# EAGLE board ESP32 Display 4.3 inch V1.2(1) (EAGLE 9.6.2), part 1 of 2
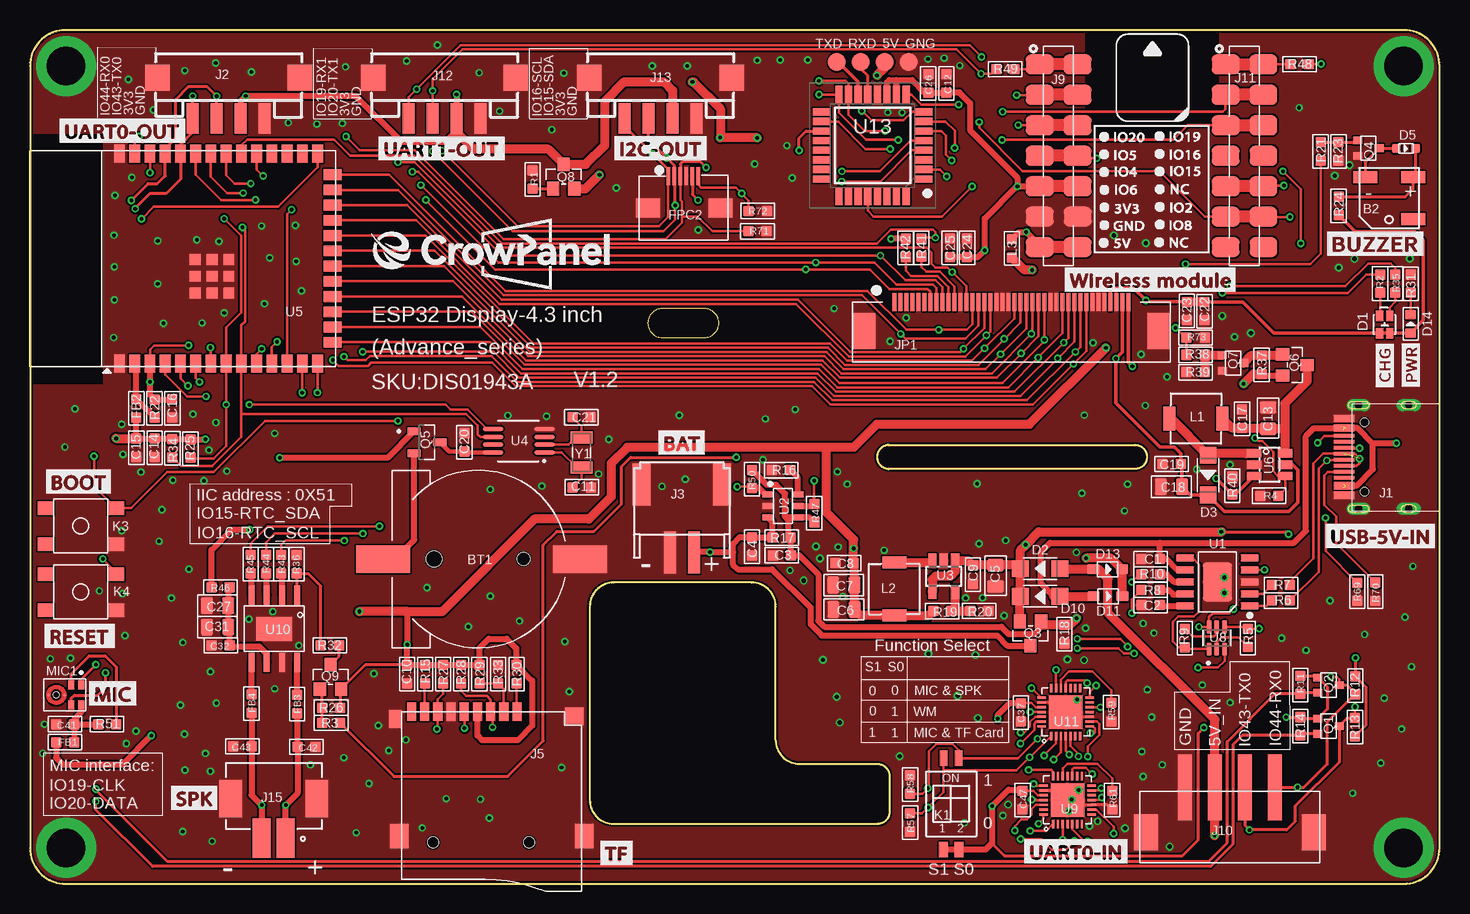
[diagram p0: board, top side]
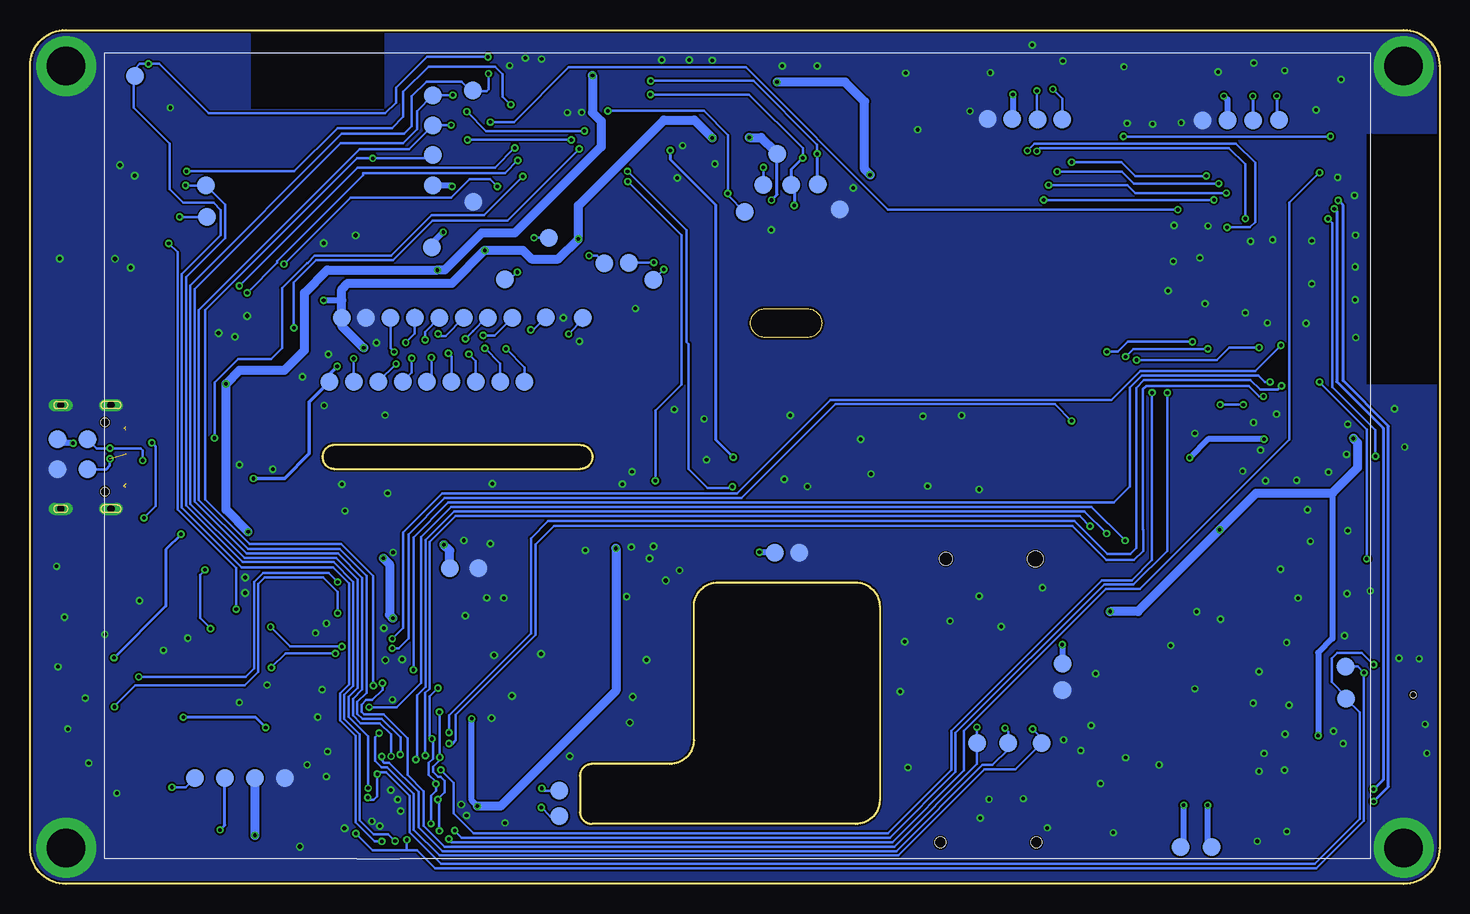
[diagram p1: board, bottom side, seen from below]

Size 117.5 x 71.2 mm. Coordinates in mm from the lower left corner, seen from the top.
Outline: 114.5,71.2 3,71.2 arc90 0,68.2 0,3 arc90 3,0 114.5,0 arc90 117.5,3 117.5,68.2 arc90 114.5,71.2
Outline: 70.62,35.6 arc90 71.62,34.6 92.12,34.6 arc90 93.12,35.6 arc90 92.12,36.6 71.62,36.6 arc90 70.62,35.6
Outline: 70.65,10 arc-90 71.65,9 71.65,6 arc-90 70.65,5 48.67,5 arc-90 46.67,7 46.67,23.13 arc-90 48.67,25.13 60.17,25.13 arc-90 62.17,23.13 62.17,12 arc90 64.17,10 70.65,10
Outline: 52.7,45.56 56.22,45.56 arc180 56.22,47.96 52.7,47.96 arc180 52.7,45.56
Copper layers (1*16): Top 0.035mm / dielectric 1.5mm / Bottom 0.035mm
Design rules "default *": minimum track width 8mil, minimum drill 0.3mm, track to track 6mil, track to pad 6mil, pad to pad 4mil, via to via 6mil, smd to smd 6mil, copper to edge 6mil, drill to drill 4mil, minimum pad ring 6mil, minimum via ring 6mil, stop-mask expansion 4mil, vias tented up to drill 100mil, thermal gap 0mil
tKeepout: area 54.3,22.9 to 63.2,29.9; area 0,41.7 to 6,62.4
tRestrict: area 88,64.6 to 99.1,71.2; area 0.1,41.7 to 6.1,62.5
bRestrict: area 88,64.6 to 99.1,71.2; area -0.1,41.7 to 6.1,62.5

## Footprints (pad centres in the part's own frame; a part is rotated, then mirrored left to right if it is on the bottom)
BEEP_5025 = smd 2 x 1: 1 -2,-1.75; 2 2,-1.75; 3 -2,1.75
CR1220 = smd 2.3 x 4.5: N 0,8.425; P 0,-7.975 | hole 1.3: 0,-3.725 | hole 1.05: 0,3.725
C0603 = smd 0.889 x 0.889: 1 -0.762,0; 2 0.762,0
C0805 = smd 1.016 x 1.397: 1 -0.889,0; 2 0.889,0
LED_KT-0603RYG = smd 0.85 x 0.6: 1 0.725,-0.425; 2 0.725,0.425; 3 -0.725,-0.425; 4 -0.725,0.425
D_SOD123FL = smd 1.397 x 1.397: + -1.651,0; - 1.651,0
D_SOD523 = smd 0.762 x 0.7: + -0.8,0; - 0.8,0
D_SOD323 = smd 1 x 0.8: + -1.2,0; - 1.2,0
LED0603 = smd 0.762 x 0.889: + -0.762,0; - 0.762,0
L0603 = smd 0.889 x 0.889: 1 -0.762,0; 2 0.762,0
FPC-6PIN-0.5MM = smd 0.3 x 1.5: 1 -1.31,2.184; 2 -0.81,2.184; 3 -0.31,2.184; 4 0.19,2.184; 5 0.69,2.184; 6 1.19,2.184 | smd 2 x 1.6: 7 -3.01,-0.496; 8 3.036,-0.496
USB-3.0TYPEC-SMD = smd 0.3 x 1.7: A1 -3.35,0.5; A4 -2.55,0.5; A5 -1.25,0.5; A6 -0.25,0.5; A7 0.25,0.5; A8 1.25,0.5; A9 2.55,0.5; A12 3.35,0.5; B1 3.05,0.5; B4 2.25,0.5; B5 1.75,0.5; B6 0.75,0.5; B7 -0.75,0.5; B8 -1.75,0.5; B9 -2.25,0.5; B12 -3.05,0.5 | drill 0.6 pad 1.016 long: P$1 -4.325,-0.72; P$2 4.325,-0.72; P$3 -4.325,-4.9; P$4 4.325,-4.9 | hole 0.68: -2.89,-1.22; 2.89,-1.22
CONNECTOR_4P-SMD-2.0 = smd 0.965 x 2.54: 1 -3,0; 2 -1,0; 3 1,0; 4 3,0 | smd 2.032 x 2.184: SS1 -5.946,3.4; SS2 5.946,3.4
PH2.0WT-2PIN = smd 1 x 3.5: P$1 -1,0; P$2 1,0 | smd 1.5 x 3.5: P$3 -3.35,-5.7; P$4 3.35,-5.7
THO-M3.2*5MM-HOLE = drill 3.2 pad 5: P$1 0,0
9P-SMD-W/-RING = smd 1.524 x 0.762: 1 0,4.4; 2 0,3.3; 3 0,2.2; 4 0,1.1; 5 0,0; 6 0,-1.1; 7 0,-2.2; 8 0,-3.3; 9 0,-4.4 | smd 1.524 x 1.016: G1 0.6,-5.746 | smd 2.032 x 1.524: G2 10.373,-5.4; G3 10.373,10 | smd 1.524 x 1.524: G4 0.392,9.181 | hole 0.889: 10.9,-2.6; 10.9,5.4
H7-2.54-18.28X2.5X5MM = smd 1.65 x 2.3: 1 -7.62,-1.58; 1-1 -7.62,1.58; 2 -5.08,-1.58; 2-2 -5.08,1.58; 3 -2.54,-1.58; 3-3 -2.54,1.58; 4 0,-1.58; 4-4 0,1.58; 5 2.54,-1.58; 5-5 2.54,1.58; 6 5.08,-1.58; 6-6 5.08,1.58; 7 7.62,-1.58; 7-7 7.62,1.58
XH2.54-4P-SMD = smd 1.2 x 5.5: 1 -3.75,-1.875; 2 -1.25,-1.875; 3 1.25,-1.875; 4 3.75,-1.875 | smd 2 x 3: 5 -7,1.875; 6 7,1.875
TEST-PIN-4-2.0MM = smd 1.5 x 1.5: 1 -3,0; 2 -1,0; 3 1,0; 4 3,0
CONN-TH_2P-P2.00_XUNPU_WAFER-PH2.0-2PLB = smd 1.5 x 3.3: 1 -1,1.65; 2 1,1.65 | smd 1.9 x 3.1: 3 3.6,-1.65; 4 -3.6,-1.65
COOPER_0.5MM*40P = smd 0.3 x 1.5: P$1 -8.81,1.73; P$2 -8.31,1.73; P$3 -7.81,1.73; P$4 -7.31,1.73; P$5 -6.81,1.73; P$6 -6.31,1.73; P$7 -5.81,1.73; P$8 -5.31,1.73; P$9 -4.81,1.73; P$10 -4.31,1.73; P$11 -3.81,1.73; P$12 -3.31,1.73; P$13 -2.81,1.73; P$14 -2.31,1.73; P$15 -1.81,1.73; P$16 -1.31,1.73; P$17 -0.81,1.73; P$18 -0.31,1.73; P$19 0.19,1.73; P$20 0.69,1.73; P$21 1.19,1.73; P$22 1.69,1.73; P$23 2.19,1.73; P$24 2.69,1.73; P$25 3.19,1.73; P$26 3.69,1.73; P$27 4.19,1.73; P$28 4.69,1.73; P$29 5.19,1.73; P$30 5.69,1.73; P$31 6.19,1.73; P$32 6.69,1.73; P$33 7.19,1.73; P$34 7.69,1.73; P$35 8.19,1.73; P$36 8.69,1.73; P$37 9.19,1.73; P$38 9.69,1.73; P$39 10.19,1.73; P$40 10.69,1.73 | smd 1.8 x 3: P$41 -11.31,-0.67; P$42 13.19,-0.67
SW-SMD_DSHP02TS-S_1 = smd 0.76 x 1.27: 1 -0.635,-3.81; 2 0.635,-3.81 | smd 0.635 x 1.27: 3 0.635,3.81; 4 -0.635,3.81
KEY-4.5X4.5-SMD = smd 1.35 x 1.1: 1 -2.925,1.5; 2 -2.925,-1.5; 3 2.925,-1.5; 4 2.925,1.5
L0420 = smd 2 x 1: 1 0,2.2; 2 0,-2.2
MIC-SMD_5P-L3.5-W2.7-P1.67 = smd 0.725 x 0.522: 1 -0.838,1.362; 2 -0.838,0.542; 3 0.838,0.542; 4 0.838,1.362 | smd 0.25 x 0.25: 5_1 0,-0.048; 5_2 0,-1.373 | hole 0.5: 0,-0.71
TEST_PAD-1.5MM = smd 1.5 x 1.5: P$1 0,0
MOS_SOT323 = smd 0.635 x 0.762: 1 -0.635,-0.889; 2 0.635,-0.889; 3 0,0.889
PMOS_SOT23 = smd 1.016 x 1.143: 1 -0.889,-1.016; 2 0.889,-1.016; 3 0,1.016
SOT-23 = smd 1.09 x 0.61: 1 -1.07,0.915; 2 -1.07,-0.915; 3 1.07,0
R0603-SP = smd 0.889 x 0.889: 1 -0.762,0; 2 0.762,0
ESOP-10-EP-150MIL = smd 1.5 x 0.6: 1 -2.7,2; 2 -2.7,1; 3 -2.7,0; 4 -2.7,-1; 5 -2.7,-2; 6 2.7,-2; 7 2.7,-1; 8 2.7,0; 9 2.7,1; 10 2.7,2 | smd 2.4 x 3.2: EP 0,0
SOT23-6L = smd 0.5 x 0.9: 1 -0.961,-1.212; 2 -0.011,-1.212; 3 0.94,-1.212; 4 0.94,1.288; 5 -0.011,1.288; 6 -0.961,1.288
IC_SOT23-5 = smd 0.69 x 1.2: 1 -0.95,-1.3; 2 0,-1.3; 3 0.95,-1.3; 4 0.95,1.3; 5 -0.95,1.3
MSOP-8 = smd 0.364 x 1.692: 1 -0.975,-2.146; 2 -0.325,-2.146; 3 0.325,-2.146; 4 0.975,-2.146; 5 0.975,2.146; 6 0.325,2.146; 7 -0.325,2.146; 8 -0.975,2.146
ESP32-S3-WROOM-1-SMD41 = smd 1.5 x 0.9: 1 -8.75,5.26; 2 -8.75,3.99; 3 -8.75,2.72; 4 -8.75,1.45; 5 -8.75,0.18; 6 -8.75,-1.09; 7 -8.75,-2.36; 8 -8.75,-3.63; 9 -8.75,-4.9; 10 -8.75,-6.17; 11 -8.75,-7.44; 12 -8.75,-8.71; 13 -8.75,-9.98; 14 -8.75,-11.25; 27 8.75,-11.25; 28 8.75,-9.98; 29 8.75,-8.71; 30 8.75,-7.44; 31 8.75,-6.17; 32 8.75,-4.9; 33 8.75,-3.63; 34 8.75,-2.36; 35 8.75,-1.09; 36 8.75,0.18; 37 8.75,1.45; 38 8.75,2.72; 39 8.75,3.99; 40 8.75,5.26 | smd 0.9 x 1.5: 15 -6.985,-12.5; 16 -5.715,-12.5; 17 -4.445,-12.5; 18 -3.175,-12.5; 19 -1.905,-12.5; 20 -0.635,-12.5; 21 0.635,-12.5; 22 1.905,-12.5; 23 3.175,-12.5; 24 4.445,-12.5; 25 5.715,-12.5; 26 6.985,-12.5 | smd 0.9 x 0.9: 41 -2.9,-1.06; 42 -1.5,-1.06; 43 -0.1,-1.06; 44 -2.9,-2.46; 45 -1.5,-2.46; 46 -0.1,-2.46; 47 -2.9,-3.86; 48 -1.5,-3.86; 49 -0.1,-3.86
COOPER_SOT23-6 = smd 0.69 x 1.2: 1 -0.95,-1.3; 2 0,-1.3; 3 0.95,-1.3; 4 0.95,1.3; 5 0,1.3; 6 -0.95,1.3
SOP65P210X100-6N = smd 1.09 x 0.4: 1 -0.92,0.65; 2 -0.92,0; 3 -0.92,-0.65; 4 0.92,-0.65; 5 0.92,0; 6 0.92,0.65
QFN-28_L4.0-W4.0-P0.40-BL-EP2.8 = smd 0.2 x 0.7: 1 -1.2,-2; 2 -0.8,-2; 3 -0.4,-2; 4 0,-2; 5 0.4,-2; 6 0.8,-2; 7 1.2,-2; 15 1.2,2; 16 0.8,2; 17 0.4,2; 18 0,2; 19 -0.4,2; 20 -0.8,2; 21 -1.2,2 | smd 0.7 x 0.2: 8 2,-1.2; 9 2,-0.8; 10 2,-0.4; 11 2,0; 12 2,0.4; 13 2,0.8; 14 2,1.2; 22 -2,1.2; 23 -2,0.8; 24 -2,0.4; 25 -2,0; 26 -2,-0.4; 27 -2,-0.8; 28 -2,-1.2 | smd 2.8 x 2.8: 29 0,0
NS4168-ESOP-8 = smd 1.6 x 0.5: 1 -2.8,1.905; 2 -2.8,0.635; 3 -2.8,-0.635; 4 -2.8,-1.905; 5 2.8,-1.905; 6 2.8,-0.635; 7 2.8,0.635; 8 2.8,1.905 | smd 2 x 3: 9 0,0
QFP80P900X900X165-32N = smd 1.475 x 0.6: 1 -4.238,2.8; 2 -4.238,2; 3 -4.238,1.2; 4 -4.238,0.4; 5 -4.238,-0.4; 6 -4.238,-1.2; 7 -4.238,-2; 8 -4.238,-2.8; 17 4.238,-2.8; 18 4.238,-2; 19 4.238,-1.2; 20 4.238,-0.4; 21 4.238,0.4; 22 4.238,1.2; 23 4.238,2; 24 4.238,2.8 | smd 0.6 x 1.475: 9 -2.8,-4.238; 10 -2,-4.238; 11 -1.2,-4.238; 12 -0.4,-4.238; 13 0.4,-4.238; 14 1.2,-4.238; 15 2,-4.238; 16 2.8,-4.238; 25 2.8,4.238; 26 2,4.238; 27 1.2,4.238; 28 0.4,4.238; 29 -0.4,4.238; 30 -1.2,4.238; 31 -2,4.238; 32 -2.8,4.238
SMD3215-2P = smd 1 x 1.8: 1 -1.25,0; 2 1.25,0

## Placement (x,y rotation side)
B2  BEEP_5025  [BEEP_5025]  113.3,57.19 180 top
BT1  CR1220  [CR1220]  37.41,27.09 270 top
C1  1uF  [C0603]  93.42,27.08 0 top
C2  1uF  [C0603]  93.41,23.25 0 top
C3  1uF  [C0603]  62.68,27.4 0 top
C4  NC/10uF  [C0603]  60.2,28.13 90 top
C5  22uF  [C0805]  80.49,25.69 90 top
C6  22uF  [C0805]  67.86,22.89 0 top
C7  22uF  [C0805]  67.84,24.92 0 top
C8  1uF  [C0603]  67.89,26.75 0 top
C9  1uF  [C0603]  78.6,25.78 90 top
C10  1uF  [C0603]  31.44,17.49 90 top
C11  18pF  [C0603]  46,33.07 0 top
C12  10uF  [C0603]  76.4,66.74 270 top
C13  22uF  [C0805]  103.2,38.84 90 top
C14  10uF  [C0603]  10.4,36.36 90 top
C15  100nF  [C0603]  8.87,36.36 90 top
C16  1uF  [C0603]  11.87,39.65 90 top
C17  1uF  [C0603]  101.03,38.79 270 top
C18  22uF  [C0805]  95.15,33.11 180 top
C19  100nF  [C0603]  95.17,35.01 0 top
C20  1uF  [C0603]  36.22,36.83 90 top
C21  18pF  [C0603]  45.97,38.91 180 top
C22  4.7uF  [C0603]  97.92,47.75 90 top
C23  100nF  [C0603]  96.44,47.76 90 top
C24  10uF  [C0603]  78.12,53.03 270 top
C25  100nF  [C0603]  76.68,53.03 270 top
C26  100nF  [C0603]  74.88,66.75 270 top
C27  47uF  [C0805]  15.64,23.2 180 top
C31  47uF  [C0805]  15.64,21.42 180 top
C32  100nF  [C0603]  15.9,19.88 180 top
C37  1uF  [C0603]  82.6,14.3 90 top
C41  100nF  [C0603]  2.94,13.32 0 top
C42  1nF  [C0603]  23.06,11.42 180 top
C43  1nF  [C0603]  17.71,11.47 0 top
C47  1uF  [C0603]  82.75,6.99 270 top
D1  KT-0603RYG  [LED_KT-0603RYG]  112.92,46.64 270 top
D2  DSS34  [D_SOD123FL]  84.21,26.29 180 top
D3  DSS34  [D_SOD123FL]  98.21,34.08 270 top
D5  B5819WT  [D_SOD523]  114.7,61.32 0 top
D10  DSS34  [D_SOD123FL]  84.21,23.98 180 top
D11  1N5817WS  [D_SOD323]  89.86,23.99 0 top
D13  1N5817WS  [D_SOD323]  89.84,26.24 0 top
D14  Red  [LED0603]  115.09,46.7 90 top
FB1  0R/800mA  [L0603]  2.94,11.82 0 top
FB2  0R/800mA  [L0603]  8.87,39.66 90 top
FB3  1K/300mA  [L0603]  22.27,15 270 top
FB4  1K/300mA  [L0603]  18.47,15.03 270 top
FPC2  FPC-6PIN-0.5MM  [FPC-6PIN-0.5MM]  54.53,56.83 0 top
J1  TYPEC-3.0-16P-SMD  [USB-3.0TYPEC-SMD]  110.03,35.6 90 top
J2  HY2.0-4P-SMT  [CONNECTOR_4P-SMD-2.0]  16.57,63.83 0 top
J3  PH2.0WT-2PIN  [PH2.0WT-2PIN]  54.35,27.62 180 top
J4  THO-M3.25MM-HOLE  [THO-M3.2*5MM-HOLE]  114.5,3 0 top
J5  [9P-SMD-W/-RING]  36.2,14.36 270 top
J6  THO-M3.25MM-HOLE  [THO-M3.2*5MM-HOLE]  3,3 0 top
J7  THO-M3.25MM-HOLE  [THO-M3.2*5MM-HOLE]  114.5,68.2 0 top
J8  THO-M3.25MM-HOLE  [THO-M3.2*5MM-HOLE]  3,68.2 0 top
J9  [H7-2.54-18.28X2.5X5MM]  85.75,60.71 270 top
J10  XH2.54-4P-SMT  [XH2.54-4P-SMD]  100.02,6.18 180 top
J11  [H7-2.54-18.28X2.5X5MM]  101.24,60.71 270 top
J12  HY2.0-4P-SMT  [CONNECTOR_4P-SMD-2.0]  34.57,63.83 0 top
J13  HY2.0-4P-SMT  [CONNECTOR_4P-SMD-2.0]  52.57,63.83 0 top
J14  HC-PZ200-8.7L-1X4PZ1  [TEST-PIN-4-2.0MM]  70.27,68.52 0 top
J15  WAFER-PH2.0-2PLB  [CONN-TH_2P-P2.00_XUNPU_WAFER-PH2.0-2PLB]  20.32,5.46 180 top
JP1  COOPER_0.5MM-40PIN40PIN  [COOPER_0.5MM*40P]  80.87,46.76 0 top
K1  DSHP02TS-S  [SW-SMD_DSHP02TS-S_1]  76.79,6.68 0 top
K3  KEY-4.5X4.5  [KEY-4.5X4.5-SMD]  4.24,29.83 180 top
K4  KEY-4.5X4.5  [KEY-4.5X4.5-SMD]  4.24,24.33 180 top
L1  4.7uH/3A  [L0420]  97.2,38.81 270 top
L2  4.7uH/3A  [L0420]  72.04,24.59 0 top
L3  NC  [L0603]  81.85,53 270 top
MIC1  LMD3526B261-OFA01  [MIC-SMD_5P-L3.5-W2.7-P1.67]  2.91,15.76 270 top
P1  TEST_PADPAD-1.5MM  [TEST_PAD-1.5MM]  115.19,37.07 0 bottom
P2  TEST_PADPAD-1.5MM  [TEST_PAD-1.5MM]  112.69,37.07 0 bottom
P3  TEST_PADPAD-1.5MM  [TEST_PAD-1.5MM]  112.69,34.57 0 bottom
P4  TEST_PADPAD-1.5MM  [TEST_PAD-1.5MM]  115.19,34.57 0 bottom
P5  TEST_PADPAD-1.5MM  [TEST_PAD-1.5MM]  102.74,55.62 180 bottom
P6  TEST_PADPAD-1.5MM  [TEST_PAD-1.5MM]  33.15,11.75 0 bottom
P7  TEST_PADPAD-1.5MM  [TEST_PAD-1.5MM]  35.94,11.76 0 bottom
P8  TEST_PADPAD-1.5MM  [TEST_PAD-1.5MM]  38.55,11.74 0 bottom
P9  TEST_PADPAD-1.5MM  [TEST_PAD-1.5MM]  55.4,27.6 180 bottom
P10  TEST_PADPAD-1.5MM  [TEST_PAD-1.5MM]  53.37,27.63 180 bottom
P11  TEST_PADPAD-1.5MM  [TEST_PAD-1.5MM]  82.52,26.31 0 bottom
P12  TEST_PADPAD-1.5MM  [TEST_PAD-1.5MM]  80.12,26.33 0 bottom
P13  TEST_PADPAD-1.5MM  [TEST_PAD-1.5MM]  31.43,18.35 0 bottom
P14  TEST_PADPAD-1.5MM  [TEST_PAD-1.5MM]  102.84,58.24 180 bottom
P15  TEST_PADPAD-1.5MM  [TEST_PAD-1.5MM]  19.76,63.65 0 bottom
P16  TEST_PADPAD-1.5MM  [TEST_PAD-1.5MM]  7.81,15.45 0 bottom
P17  TEST_PADPAD-1.5MM  [TEST_PAD-1.5MM]  98.77,8.83 0 bottom
P18  TEST_PADPAD-1.5MM  [TEST_PAD-1.5MM]  96.27,8.83 0 bottom
P19  TEST_PADPAD-1.5MM  [TEST_PAD-1.5MM]  101.27,8.83 0 bottom
P20  TEST_PADPAD-1.5MM  [TEST_PAD-1.5MM]  103.77,8.83 0 bottom
P21  TEST_PADPAD-1.5MM  [TEST_PAD-1.5MM]  83.93,65.74 0 bottom
P22  TEST_PADPAD-1.5MM  [TEST_PAD-1.5MM]  83.93,63.22 0 bottom
P23  TEST_PADPAD-1.5MM  [TEST_PAD-1.5MM]  83.93,60.76 0 bottom
P25  TEST_PADPAD-1.5MM  [TEST_PAD-1.5MM]  21.6,3.06 0 bottom
P26  TEST_PADPAD-1.5MM  [TEST_PAD-1.5MM]  18.99,3.06 0 bottom
P27  TEST_PADPAD-1.5MM  [TEST_PAD-1.5MM]  7.84,18.12 0 bottom
P28  TEST_PADPAD-1.5MM  [TEST_PAD-1.5MM]  31.44,16.14 0 bottom
P31  TEST_PADPAD-1.5MM  [TEST_PAD-1.5MM]  17.68,63.68 0 bottom
P32  TEST_PADPAD-1.5MM  [TEST_PAD-1.5MM]  35.62,63.78 0 bottom
P33  TEST_PADPAD-1.5MM  [TEST_PAD-1.5MM]  15.53,63.68 0 bottom
P34  TEST_PADPAD-1.5MM  [TEST_PAD-1.5MM]  13.38,63.7 0 bottom
P35  TEST_PADPAD-1.5MM  [TEST_PAD-1.5MM]  31.45,63.74 0 bottom
P36  TEST_PADPAD-1.5MM  [TEST_PAD-1.5MM]  33.48,63.74 0 bottom
P37  TEST_PADPAD-1.5MM  [TEST_PAD-1.5MM]  37.67,63.79 0 bottom
P38  TEST_PADPAD-1.5MM  [TEST_PAD-1.5MM]  55.21,60.88 0 bottom
P39  TEST_PADPAD-1.5MM  [TEST_PAD-1.5MM]  54.04,58.28 0 bottom
P40  TEST_PADPAD-1.5MM  [TEST_PAD-1.5MM]  51.83,58.33 0 bottom
P41  TEST_PADPAD-1.5MM  [TEST_PAD-1.5MM]  50.02,56.25 0 bottom
P42  TEST_PADPAD-1.5MM  [TEST_PAD-1.5MM]  73.39,7.77 270 bottom
P43  TEST_PADPAD-1.5MM  [TEST_PAD-1.5MM]  73.37,5.66 270 bottom
P44  TEST_PADPAD-1.5MM  [TEST_PAD-1.5MM]  91.51,47.2 0 bottom
P45  TEST_PADPAD-1.5MM  [TEST_PAD-1.5MM]  89.48,47.2 0 bottom
P46  TEST_PADPAD-1.5MM  [TEST_PAD-1.5MM]  92.53,41.87 0 bottom
P47  TEST_PADPAD-1.5MM  [TEST_PAD-1.5MM]  90.5,41.87 0 bottom
P48  TEST_PADPAD-1.5MM  [TEST_PAD-1.5MM]  88.47,41.87 0 bottom
P49  TEST_PADPAD-1.5MM  [TEST_PAD-1.5MM]  87.45,47.2 0 bottom
P50  TEST_PADPAD-1.5MM  [TEST_PAD-1.5MM]  86.43,41.87 0 bottom
P51  TEST_PADPAD-1.5MM  [TEST_PAD-1.5MM]  85.42,47.2 0 bottom
P52  TEST_PADPAD-1.5MM  [TEST_PAD-1.5MM]  84.4,41.87 0 bottom
P53  TEST_PADPAD-1.5MM  [TEST_PAD-1.5MM]  83.39,47.2 0 bottom
P54  TEST_PADPAD-1.5MM  [TEST_PAD-1.5MM]  82.37,41.87 0 bottom
P55  TEST_PADPAD-1.5MM  [TEST_PAD-1.5MM]  81.35,47.2 0 bottom
P56  TEST_PADPAD-1.5MM  [TEST_PAD-1.5MM]  80.34,41.87 0 bottom
P57  TEST_PADPAD-1.5MM  [TEST_PAD-1.5MM]  79.32,47.2 0 bottom
P58  TEST_PADPAD-1.5MM  [TEST_PAD-1.5MM]  108.74,67.35 0 bottom
P59  TEST_PADPAD-1.5MM  [TEST_PAD-1.5MM]  80.6,66.18 0 bottom
P60  TEST_PADPAD-1.5MM  [TEST_PAD-1.5MM]  80.55,56.86 0 bottom
P61  TEST_PADPAD-1.5MM  [TEST_PAD-1.5MM]  83.9,58.26 0 bottom
P62  TEST_PADPAD-1.5MM  [TEST_PAD-1.5MM]  83.98,53.08 0 bottom
P63  TEST_PADPAD-1.5MM  [TEST_PAD-1.5MM]  78.31,41.87 0 bottom
P64  TEST_PADPAD-1.5MM  [TEST_PAD-1.5MM]  77.29,47.2 0 bottom
P65  TEST_PADPAD-1.5MM  [TEST_PAD-1.5MM]  76.27,41.87 0 bottom
P66  TEST_PADPAD-1.5MM  [TEST_PAD-1.5MM]  71.42,47.18 0 bottom
P67  TEST_PADPAD-1.5MM  [TEST_PAD-1.5MM]  74.51,47.23 0 bottom
P68  TEST_PADPAD-1.5MM  [TEST_PAD-1.5MM]  77.9,50.39 0 bottom
P69  TEST_PADPAD-1.5MM  [TEST_PAD-1.5MM]  74.26,53.88 0 bottom
P70  TEST_PADPAD-1.5MM  [TEST_PAD-1.5MM]  69.61,51.76 0 bottom
P71  TEST_PADPAD-1.5MM  [TEST_PAD-1.5MM]  67.58,51.78 0 bottom
P72  TEST_PADPAD-1.5MM  [TEST_PAD-1.5MM]  65.54,50.35 0 bottom
P75  TEST_PADPAD-1.5MM  [TEST_PAD-1.5MM]  56.36,58.26 0 bottom
P76  TEST_PADPAD-1.5MM  [TEST_PAD-1.5MM]  57.93,56.02 0 bottom
Q1  BSS138W_SOT323  [MOS_SOT323]  108.24,13.15 270 top
Q2  BSS138W_SOT323  [MOS_SOT323]  108.24,16.58 270 top
Q3  AO3401  [PMOS_SOT23]  83.41,20.88 180 top
Q4  SS8050W-SOT323  [MOS_SOT323]  111.57,61.35 270 top
Q5  BAT54C-7-F  [SOT-23]  33.09,36.83 0 top
Q6  AO3401  [PMOS_SOT23]  105.44,43.27 270 top
Q7  SS8050W-SOT323  [MOS_SOT323]  100.29,43.43 270 top
Q8  AO3401  [PMOS_SOT23]  44.49,58.98 0 top
Q9  AO3401  [PMOS_SOT23]  25.06,17.26 0 top
R1  10K  [R0603-SP]  41.9,58.73 270 top
R2  2K  [R0603-SP]  112.54,50.05 90 top
R3  100R  [R0603-SP]  25.11,13.43 180 top
R4  10K  [R0603-SP]  103.31,32.36 0 top
R5  10K  [R0603-SP]  101.52,20.51 90 top
R6  0R  [R0603-SP]  104.28,23.62 0 top
R7  0R  [R0603-SP]  104.28,24.91 0 top
R8  0R  [R0603-SP]  93.42,24.51 0 top
R9  10K  [R0603-SP]  96.26,20.48 270 top
R10  0R  [R0603-SP]  93.41,25.81 0 top
R11  4.7K  [R0603-SP]  105.91,16.59 270 top
R12  4.7K  [R0603-SP]  110.47,16.55 270 top
R13  4.7K  [R0603-SP]  110.45,13.07 90 top
R14  4.7K  [R0603-SP]  105.91,13.15 270 top
R15  10K  [R0603-SP]  32.94,17.49 90 top
R16  2K  [R0603-SP]  62.62,34.5 0 top
R17  5.1K  [R0603-SP]  62.65,28.88 0 top
R18  10K  [R0603-SP]  86.23,20.81 90 top
R19  45.3K  [R0603-SP]  76.05,22.75 180 top
R20  10K  [R0603-SP]  79.14,22.75 180 top
R21  1K  [R0603-SP]  107.59,61.07 270 top
R22  10K  [R0603-SP]  10.38,39.64 90 top
R23  47K  [R0603-SP]  109.08,61.07 270 top
R24  3.9R  [R0603-SP]  109.09,56.53 270 top
R25  4.7K  [R0603-SP]  13.38,36.3 90 top
R26  10K  [R0603-SP]  25.11,14.69 180 top
R27  10K  [R0603-SP]  34.44,17.49 90 top
R28  10K  [R0603-SP]  35.94,17.49 90 top
R29  10K/NC  [R0603-SP]  37.46,17.49 90 top
R30  10K  [R0603-SP]  40.56,17.49 90 top
R31  5.1K  [R0603-SP]  115.1,50.05 270 top
R32  1K  [R0603-SP]  25,19.88 180 top
R33  10K  [R0603-SP]  39.01,17.49 90 top
R34  4.7K  [R0603-SP]  11.87,36.31 90 top
R35  5.1K  [R0603-SP]  113.82,50.05 90 top
R36  100K  [R0603-SP]  22.23,26.66 90 top
R37  100K  [R0603-SP]  102.67,43.28 270 top
R38  100R  [R0603-SP]  97.17,44.12 180 top
R39  10K  [R0603-SP]  97.17,42.67 180 top
R40  5.1R  [R0603-SP]  100.22,33.21 270 top
R41  0R  [R0603-SP]  74.3,53.05 90 top
R42  10K  [R0603-SP]  73,53.03 90 top
R43  0R  [R0603-SP]  20.95,26.65 90 top
R44  0R  [R0603-SP]  19.67,26.66 90 top
R45  0R  [R0603-SP]  18.39,26.66 90 top
R46  0R  [R0603-SP]  15.89,24.72 180 top
R47  5.1K  [R0603-SP]  65.38,30.92 270 top
R48  0R  [R0603-SP]  105.83,68.35 0 top
R49  0R  [R0603-SP]  81.3,67.93 180 top
R50  5.1K  [R0603-SP]  60.19,33.76 90 top
R51  10K/NC  [R0603-SP]  6.44,13.32 180 top
R57  10K  [R0603-SP]  73.37,5.11 270 top
R58  10K  [R0603-SP]  73.37,8.29 90 top
R59  10K  [R0603-SP]  90.13,14.33 270 top
R61  10K  [R0603-SP]  90.21,6.99 270 top
R69  5.1K  [R0603-SP]  110.66,24.35 90 top
R70  5.1K  [R0603-SP]  112.15,24.36 270 top
R71  5.1K  [R0603-SP]  60.65,54.41 180 top
R72  5.1K  [R0603-SP]  60.68,56.11 180 top
R73  10K/NC  [R0603-SP]  97.18,45.56 180 top
U1  CH340K  [ESOP-10-EP-150MIL]  98.98,25.18 180 top
U2  TP4059-SOT23-6  [SOT23-6L]  62.72,31.5 270 top
U3  RY3420  [IC_SOT23-5]  76.17,25.65 180 top
U4  PCF8563MDTR(XBLW)  [MSOP-8]  40.74,36.96 90 top
U5  ESP32-S3-WROOM-1  [ESP32-S3-WROOM-1-SMD41]  12.72,52.15 90 top
U6  MT9201  [COOPER_SOT23-6]  103.33,34.96 270 top
U8  UMH3NTN  [SOP65P210X100-6N]  98.93,20.51 90 top
U9  CH486F  [QFN-28_L4.0-W4.0-P0.40-BL-EP2.8]  86.49,6.99 0 top
U10  NS4168-ESOP-8  [NS4168-ESOP-8]  20.37,21.27 270 top
U11  CH486F  [QFN-28_L4.0-W4.0-P0.40-BL-EP2.8]  86.34,14.33 0 top
U13  STC8H1K28-36I-LQFP32  [QFP80P900X900X165-32N]  70.24,61.57 180 top
Y1  32.768KHZ  [SMD3215-2P]  45.98,35.97 90 top

## Library data of the parts
B2 C1-C27 C31 C32 C37 C41-C43 C47 D2 D3 D5 D10 D11 D13 D14 FB1-FB4 FPC2 J1-J13 J15 K1 K3 K4 L1-L3 P1-P23 P25-P28 P31-P72 P75 P76 Q1-Q4 Q6-Q9 R1-R51 R57-R59 R61 R69-R73 U2 U3 U5 = CrowPanel_Advance_HMI
BT1 = CR1220; AVAILABILITY: In Stock; CHECK_PRICES: https://www.snapeda.com/parts/S8411-45R/Harwin+Inc./view-part/?ref=eda; DESCRIPTION: Coin Cell Battery Retainer, Horizontal SMT, for CR1220 Coin Cell Batteries, Tape & Reeled; MF: Harwin; MP: S8411-45R; PACKAGE: None; PRICE: None; PURCHASE-URL: https://www.snapeda.com/api/url_track_click_mouser/?unipart_id=424412&manufacturer=Harwin&part_name=S8411-45R&search_term=cr1220; SNAPEDA_LINK: https://www.snapeda.com/parts/S8411-45R/Harwin+Inc./view-part/?ref=snap
D1 = KT-0603RYG
J14 = Mini PC Case
JP1 U6 = CrowPanel_Advice_HMI 4.3
MIC1 = MMICT5838-00-012
Q5 = BAT54C-7-F
U1 = sale
U4 = BM8563
U8 = UMH3NTN; AVAILABILITY: In Stock; CHECK_PRICES: https://www.snapeda.com/parts/UMH3NTN/Rohm/view-part/?ref=eda; DESCRIPTION: Pre-Biased Bipolar Transistor (BJT) 2 NPN - Pre-Biased (Dual) 50V 100mA 250MHz 150mW Surface Mount UMT6; MF: Rohm; MP: UMH3NTN; PACKAGE: SOT-363 Rohm; PRICE: None; PURCHASE-URL: https://www.snapeda.com/api/url_track_click_mouser/?unipart_id=355768&manufacturer=Rohm&part_name=UMH3NTN&search_term=umh3n; SNAPEDA_LINK: https://www.snapeda.com/parts/UMH3NTN/Rohm/view-part/?ref=snap
U9 U11 = CH48X
U10 = STC_MCUSTC8G1K08A
U13 = Brian
Y1 = Crystal; AVAILABILITY: In Stock; CHECK_PRICES: https://www.snapeda.com/parts/CM7V-T1A-32.768kHz-12.5pF-100PPM-TB-QC/Micro+Crystal/view-part/?ref=eda; DESCRIPTION: Tuning Fork Crystal 32.768kHz in SMD 1.5 x 3.2 mm package; MF: Micro Crystal; MP: CM7V-T1A-32.768kHz-12.5pF-100PPM-TB-QC; PACKAGE: SMD-2 Micro Crystal; PRICE: None; PURCHASE-URL: https://www.snapeda.com/api/url_track_click_mouser/?unipart_id=4216772&manufacturer=Micro Crystal&part_name=CM7V-T1A-32.768kHz-12.5pF-100PPM-TB-QC&search_term=crystal; SNAPEDA_LINK: https://www.snapeda.com/parts/CM7V-T1A-32.768kHz-12.5pF-100PPM-TB-QC/Micro+Crystal/view-part/?ref=snap

## Nets
3V3: C6.2 C7.2 C8.2 C10.2 C12.2 C14.2 C15.2 C22.2 C23.2 C24.2 C25.2 C26.2 C37.2 C47.1 D1.1 D1.2 D14.+ FB1.1 FB2.1 FPC2.5 J5.4 J9.5 J9.5-5 JP1.P$37 K1.1 K1.2 L2.2 P13.P$1 P38.P$1 P44.P$1 P61.P$1 Q1.1 Q2.1 Q5.1 Q8.2 Q9.2 R11.1 R14.1 R15.2 R19.2 R24.2 R25.2 R26.1 R27.2 R28.2 R29.2 R30.2 R34.2 R42.2 R46.2 U9.24 U11.24 U13.10 U13.11
3V3$: C2.2 U1.10
3V3_1: C41.2 FB1.2 MIC1.4 R51.2
3V3_NS_CTRL: Q9.3 R32.1
3V3_OUT: J2.3 J12.3 J13.3 P31.P$1 P32.P$1 Q8.3
+5V_IN: D2.+ D13.+ J10.3 P17.P$1
+VBUS1: C1.2 D10.+ D11.+ J1.A4 J1.A9 J1.B4 J1.B9 P1.P$1 U1.7
+VC_IN: C3.2 D11.- D13.- Q3.1 R17.2 R18.2 R47.2 R50.2 U2.4
DA1: J5.8 R15.1
DA2: J5.1 R30.1
DTR: R5.2 U1.4 U8.4
ESP32_EN: C16.2 K4.2 R22.2 U5.3 U8.6 U13.9
ESP_3V3: FB2.2 R22.1 U5.2
ESP_RXD0: J2.1 P34.P$1 Q2.2 R11.2 U5.36
ESP_TXD0: J2.2 P33.P$1 Q1.2 R14.2 U5.37
GND: BT1.N C1.1 C2.1 C3.1 C4.1 C5.1 C6.1 C7.1 C8.1 C9.1 C10.1 C11.2 C12.1 C13.2 C14.1 C15.1 C16.1 C17.1 C18.2 C19.1 C20.2 C21.1 C22.1 C23.1 C24.1 C25.1 C26.1 C27.2 C31.2 C32.2 C37.1 C41.1 C42.1 C43.1 C47.2 FPC2.4 FPC2.7 FPC2.8 J1.A1 J1.A12 J1.B1 J1.B12 J1.P$1 J1.P$2 J1.P$3 J1.P$4 J2.4 J2.SS1 J2.SS2 J3.P$2 J3.P$3 J3.P$4 J4.P$1 J5.6 J5.G1 J5.G2 J5.G3 J5.G4 J6.P$1 J7.P$1 J8.P$1 J9.6 J9.6-6 J10.4 J10.5 J10.6 J12.4 J12.SS1 J12.SS2 J13.4 J13.SS1 J13.SS2 J14.4 J15.3 J15.4 JP1.P$5 JP1.P$12 JP1.P$18 JP1.P$19 JP1.P$20 JP1.P$27 JP1.P$28 JP1.P$34 JP1.P$35 JP1.P$36 JP1.P$38 JP1.P$41 JP1.P$42 K3.1 K4.1 MIC1.5_1 MIC1.5_2 P4.P$1 P10.P$1 P12.P$1 P15.P$1 P18.P$1 P28.P$1 P37.P$1 P41.P$1 P45.P$1 P60.P$1 Q4.2 Q7.2 R1.1 R4.1 R16.1 R18.1 R20.1 R23.2 R31.1 R33.2 R36.2 R39.2 R40.1 R57.2 R58.2 R59.2 R61.2 R69.1 R70.2 R71.1 R72.1 R73.1 U1.3 U1.EP U2.2 U3.2 U4.4 U5.1 U5.40 U5.41 U5.42 U5.43 U5.44 U5.45 U5.46 U5.47 U5.48 U5.49 U6.2 U9.10 U9.23 U9.29 U10.7 U10.9 U11.10 U11.23 U11.29 U13.12
IO0: K3.2 U5.27 U8.3
IO1_TP_INT: FPC2.3 P75.P$1 R71.2 U5.39
IO2_W_CS: J11.5 J11.5-5 P14.P$1 U5.38
IO3_R6: JP1.P$30 P51.P$1 U5.15
IO4: U5.4 U11.27
IO4_I2S_SDIN: R45.2 U11.2
IO4_SD_MISO: J5.7 P6.P$1 R27.1 U11.8
IO4_W_MISO: J9.3 J9.3-3 P22.P$1 U11.4
IO5: U5.5 U11.26
IO5_I2S_BCLK: R44.2 U11.3
IO5_SD_SCK: J5.5 P7.P$1 U11.9
IO5_W_CLK: J9.2 J9.2-2 P21.P$1 U11.5
IO6: U5.6 U11.20
IO6_I2S_LRCLK: R43.2 U11.12
IO6_SD_MOSI: J5.3 P8.P$1 R28.1 U11.18
IO6_W_MOSI: J9.4 J9.4-4 P23.P$1 U11.14
IO7_R3: JP1.P$33 P48.P$1 U5.7
IO8_W_BUSY: J11.6 J11.6-6 P5.P$1 U5.12
IO9_G2: JP1.P$26 P53.P$1 U5.17
IO10_G3: JP1.P$25 P54.P$1 U5.18
IO11_G4: JP1.P$24 P55.P$1 U5.19
IO12_G5: JP1.P$23 P56.P$1 U5.20
IO13_G6: JP1.P$22 P57.P$1 U5.21
IO14_G7: JP1.P$21 P63.P$1 U5.22
IO15_SDA_P2_4: FPC2.2 J11.3 J11.3-3 J13.2 P39.P$1 R25.1 U4.5 U5.8 U13.16
IO16_SCL_P2_5: FPC2.1 J11.2 J11.2-2 J13.1 P40.P$1 R34.1 U4.6 U5.9 U13.15
IO17_R4: JP1.P$32 P49.P$1 U5.10
IO18_R5: JP1.P$31 P50.P$1 U5.11
IO19: U5.13 U9.26
IO19_MIC_CLK: MIC1.3 P27.P$1 U9.3 U9.9
IO19_RX_IRQ: J12.1 P35.P$1 P58.P$1 R48.2 U9.5
IO20: U5.14 U9.21
IO20_MIC_SD: MIC1.1 P16.P$1 U9.11 U9.17
IO20_TX_CE: J12.2 P36.P$1 P59.P$1 R49.2 U9.13
IO21_B3: JP1.P$17 P64.P$1 U5.23
IO38_B7: JP1.P$13 P68.P$1 U5.31
IO39_CLK_DCLK: P69.P$1 R41.2 U5.32
IO40_HSYNC: JP1.P$9 P70.P$1 U5.33
IO41_VSYNC: JP1.P$8 P71.P$1 U5.34
IO42_DE: JP1.P$7 P72.P$1 U5.35
IO45_B6: JP1.P$14 P67.P$1 U5.26
IO46_R7: JP1.P$29 P52.P$1 U5.16
IO47_B4: JP1.P$16 P65.P$1 U5.24
IO48_B5: JP1.P$15 P66.P$1 U5.25
IOT_5V: J9.7 J9.7-7 L3.1 P62.P$1
LCD_LEDA: C18.1 C19.2 D3.- JP1.P$39 P47.P$1 U6.5
LCD_LEDK: JP1.P$40 P46.P$1 R40.2 U6.3
N$1: Q8.1 R1.2
N$2: D1.3 R2.1
N$3: D1.4 R35.1
N$4: D14.- R31.2
N$5: R6.1 U1.1
N$6: R7.1 U1.2
N$7: R5.1 U8.2
N$8: R9.1 U8.5
N$9: Q9.1 R3.2 R26.2
N$10: R8.2 U1.9
N$11: R10.2 U1.8
N$12: R16.2 U2.6
N$13: L2.1 U3.3
N$14: R19.1 R20.2 U3.5
N$15: Q4.1 R21.1 R23.1
N$16: B2.2 D5.+ Q4.3
N$17: B2.1 D5.- R24.1
N$18: BT1.P Q5.2
N$19: R32.2 R36.1 U10.1
N$20: MIC1.2 R51.1
N$22: D3.+ L1.2 U6.1
N$23: J9.1 J9.1-1 R49.1
N$24: J11.1 J11.1-1 R48.1
N$25: C20.1 Q5.3 U4.8
N$26: C21.2 U4.2 Y1.2
N$28: R43.1 U10.2
N$29: Q6.1 Q7.3 R37.1
N$30: C11.1 U4.1 Y1.1
N$31: R44.1 U10.3
N$32: Q7.1 R38.1 R39.1
N$33: R45.1 U10.4
N$34: J1.B5 R69.2
N$35: R61.1 U9.19
N$37: C27.1 C31.1 C32.1 R46.1 U10.6
N$38: R59.1 U11.19
N$40: J1.A5 R70.1
N$54: JP1.P$11 R41.1
N$55: JP1.P$10 R42.1
P1_1/LED_BK_EN: R4.2 U6.4 U13.2
P1_3/DONE: R47.1 U2.5 U13.4
P1_4/CHRG: R50.1 U2.1 U13.5
P1_5/D_LED: R2.2 U13.6
P1_6/C_LED: R35.2 U13.7
P1_7/TP_RST: FPC2.6 P76.P$1 R72.2 U13.8
P2_7/BEEP: R21.2 U13.28
P3_5/LCD_BK_PWR: R38.2 R73.2 U13.18
P3_6/NS_CTRL: R3.1 U13.19
ROUT+: C42.2 FB3.2 J15.1 P25.P$1
ROUT-: C43.2 FB4.2 J15.2 P26.P$1
RTS: R9.2 U1.6 U8.1
RXD: J14.2 U13.13
RXD0_H: J10.1 P20.P$1 Q2.3 R10.1 R12.2
SDCS: J5.2 R29.1 R33.1
SEL0: K1.3 P42.P$1 R58.1 U9.22 U9.28 U11.22 U11.28
SEL1: K1.4 P43.P$1 R57.1 U9.1 U9.25 U11.1 U11.25
TXD: J14.1 U13.14
TXD0_H: J10.2 P19.P$1 Q1.3 R8.1 R13.2
USB_D+: J1.A6 J1.B6 P2.P$1 R6.2
USB_D-: J1.A7 J1.B7 P3.P$1 R7.2
VBAT: C4.2 J3.P$1 P9.P$1 Q3.3 R17.1 U2.3
VIN: C5.2 C9.2 D2.- D10.- J14.3 L3.2 P11.P$1 Q3.2 Q6.2 R12.1 R13.1 R37.2 U3.1 U3.4
VIN2: C13.1 C17.2 L1.1 Q6.3 U6.6
VON: FB4.1 U10.5
VOP: FB3.1 U10.8